# Altium PCB 15336-ROM3_tablet_RJ12.PcbDoc (part 1 of 2)
Units mil, origin at the board's own origin, x right, y up, seen from the top; angles counter-clockwise.
Board outline 3125 x 1750 mil, 4 copper layers (Top Layer, Ground, Inner, Bottom Layer), stack 61.434 mil thick; 35 components, 22 nets, 97 pads, 187 vias.
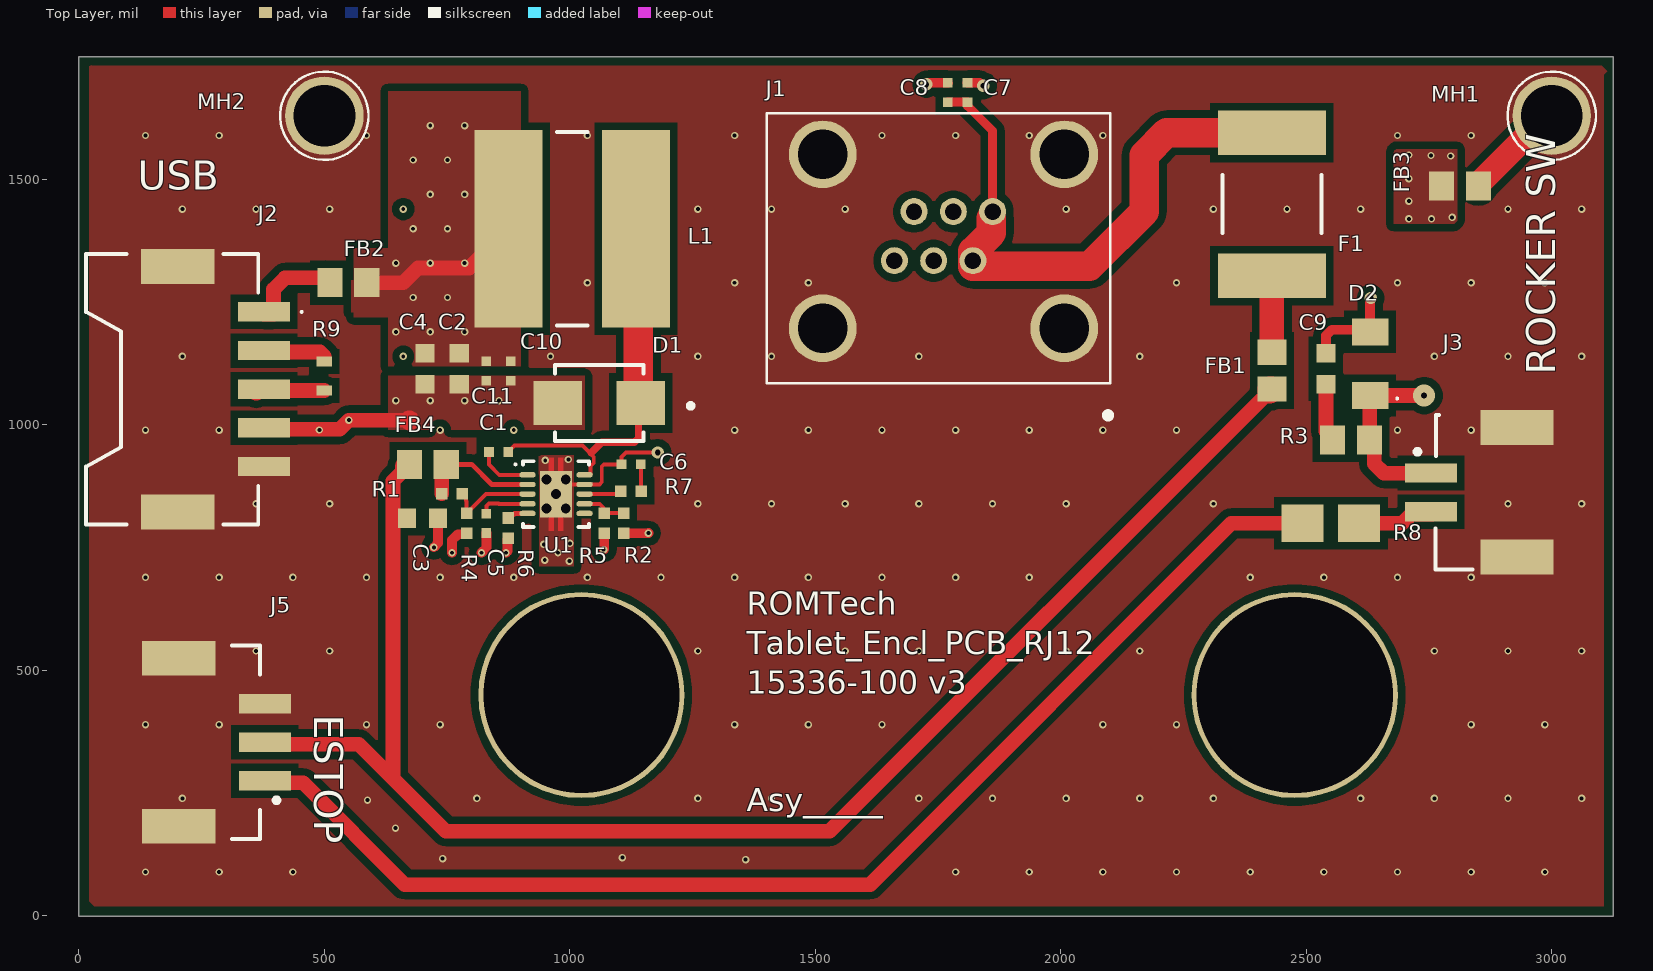
[diagram p0: Top Layer view]
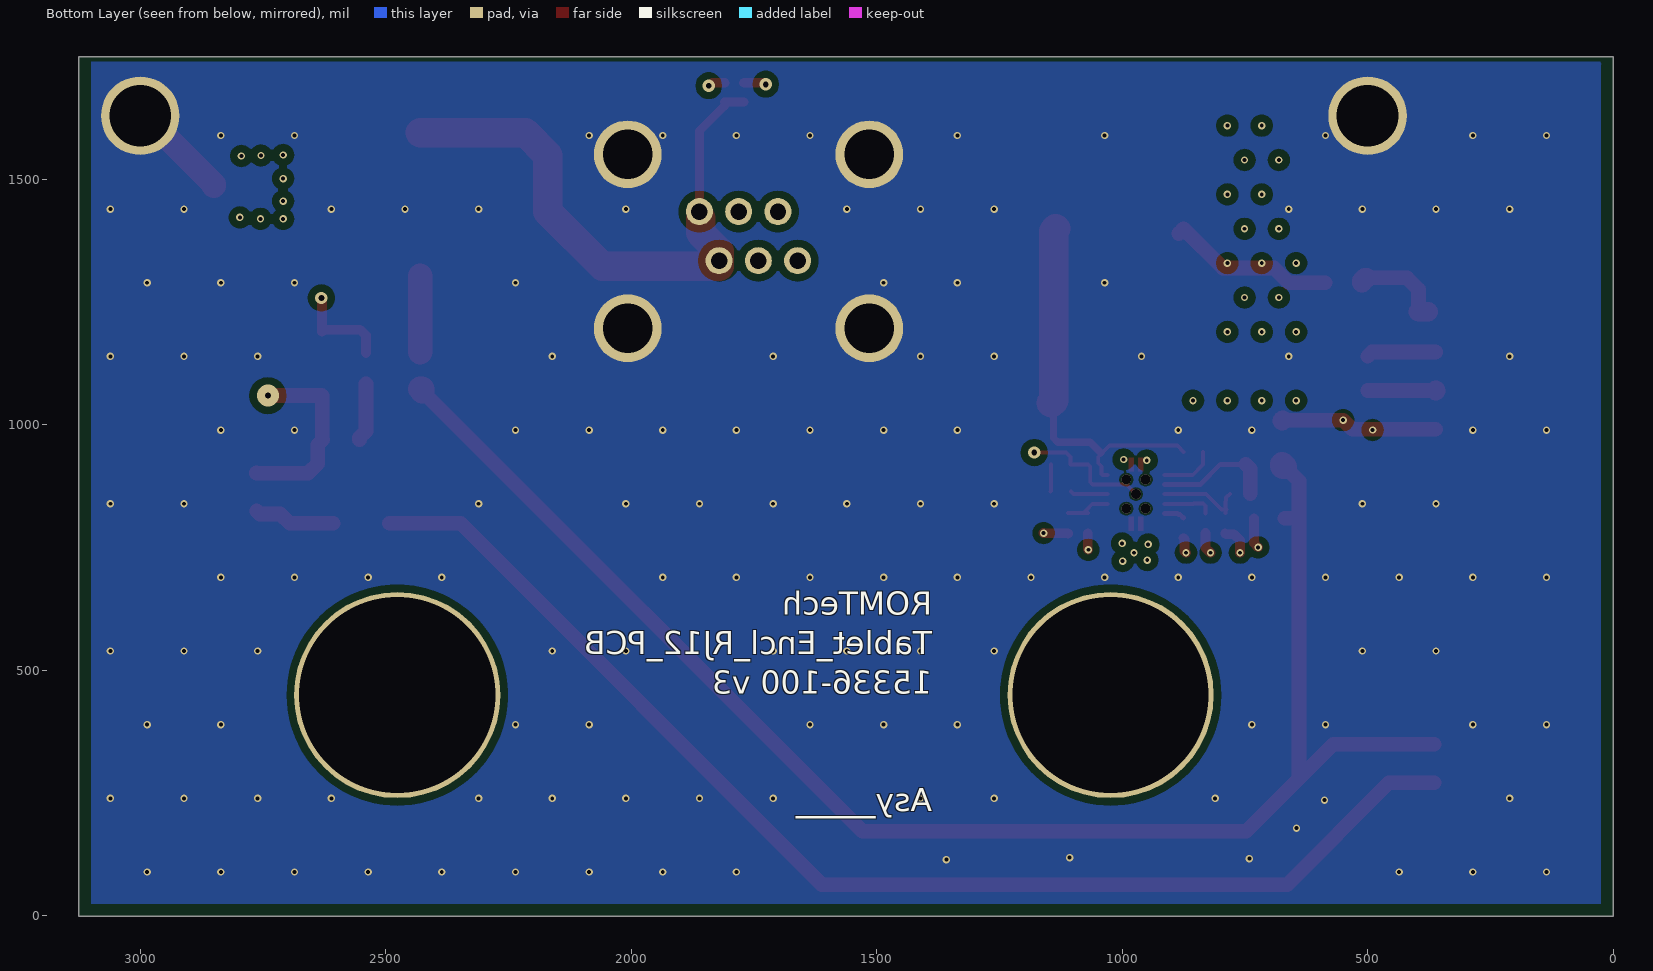
[diagram p1: Bottom Layer view, seen from below]
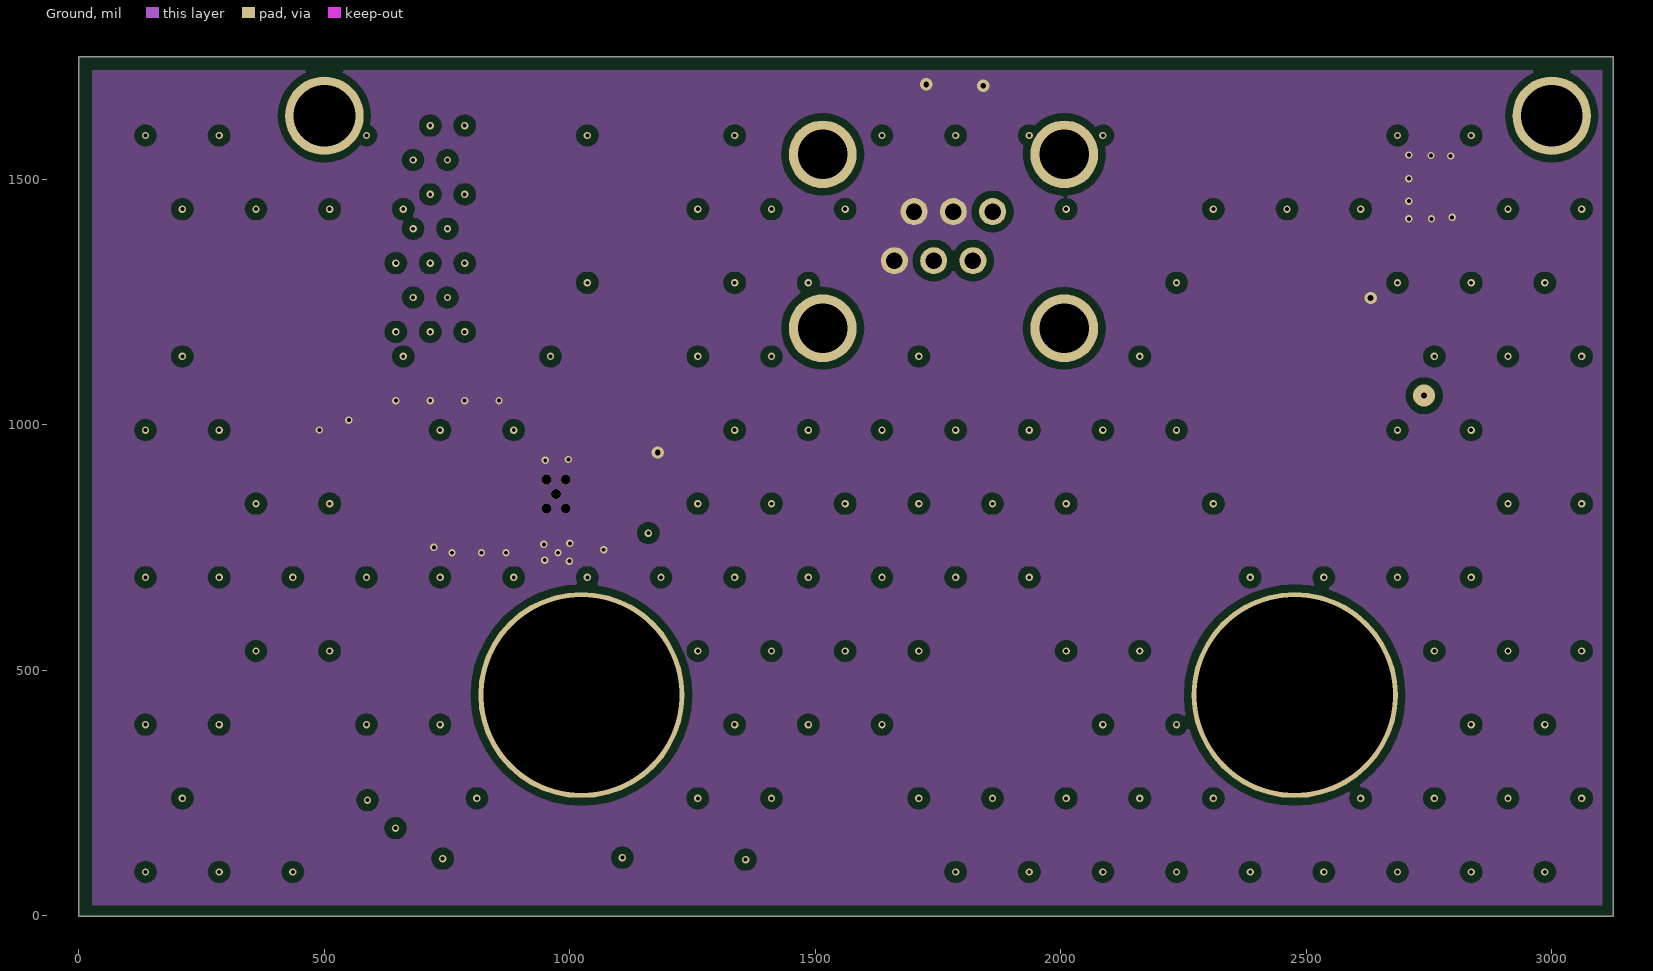
[diagram p2: Ground]
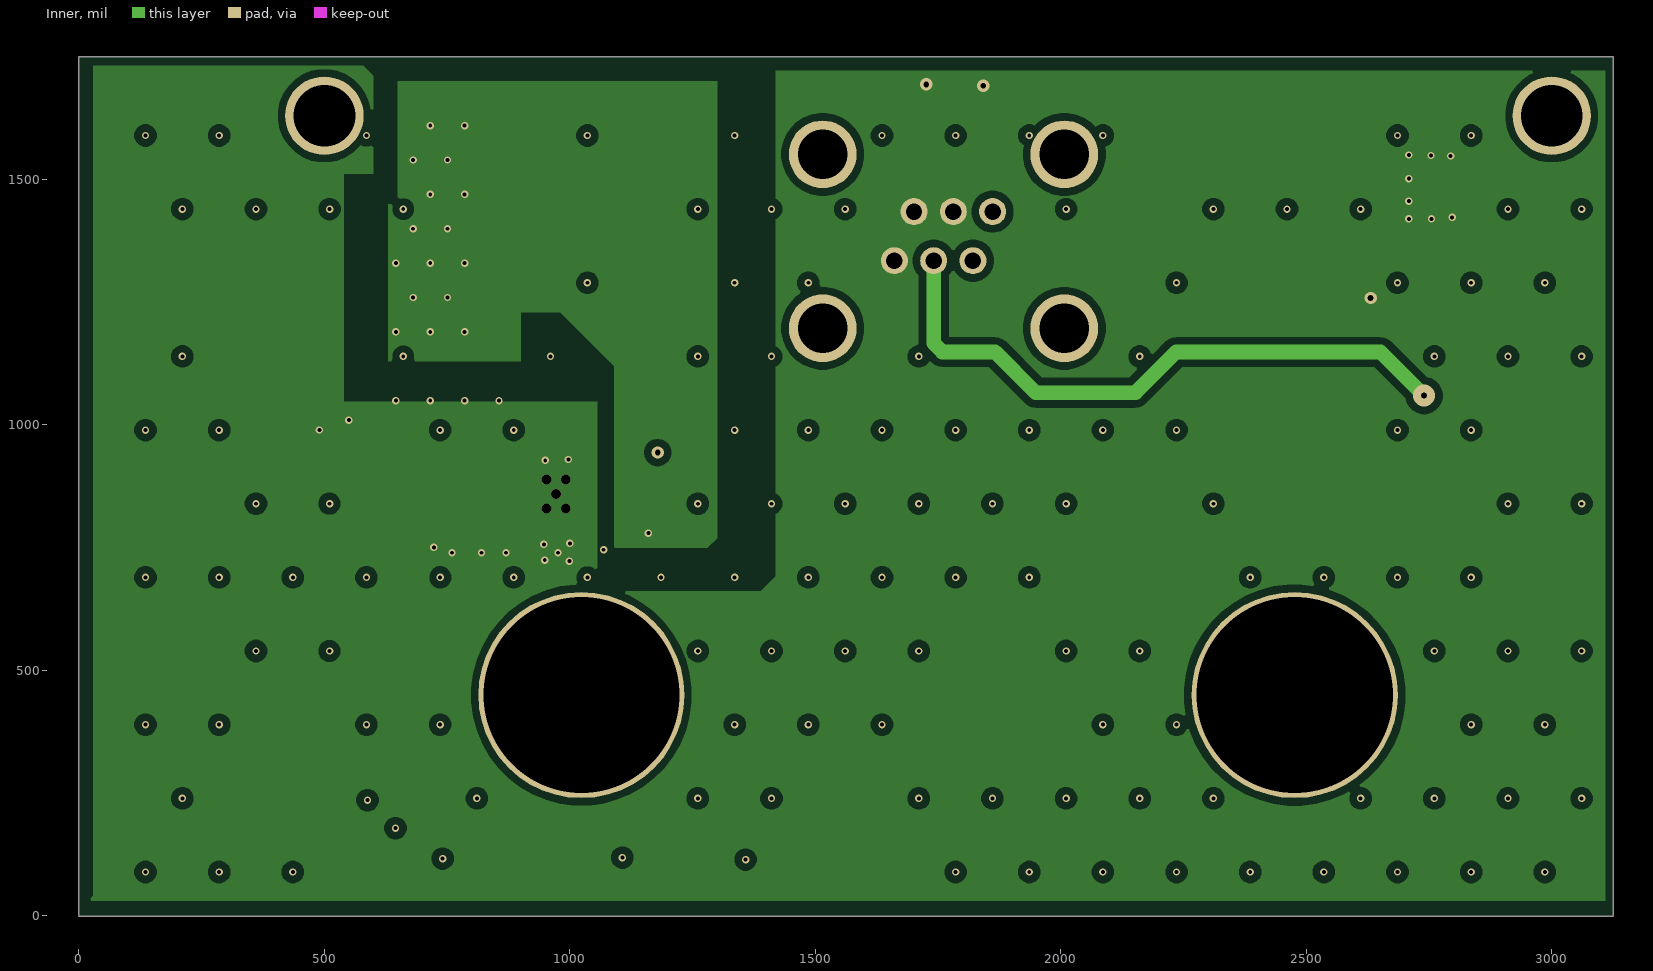
[diagram p3: Inner]
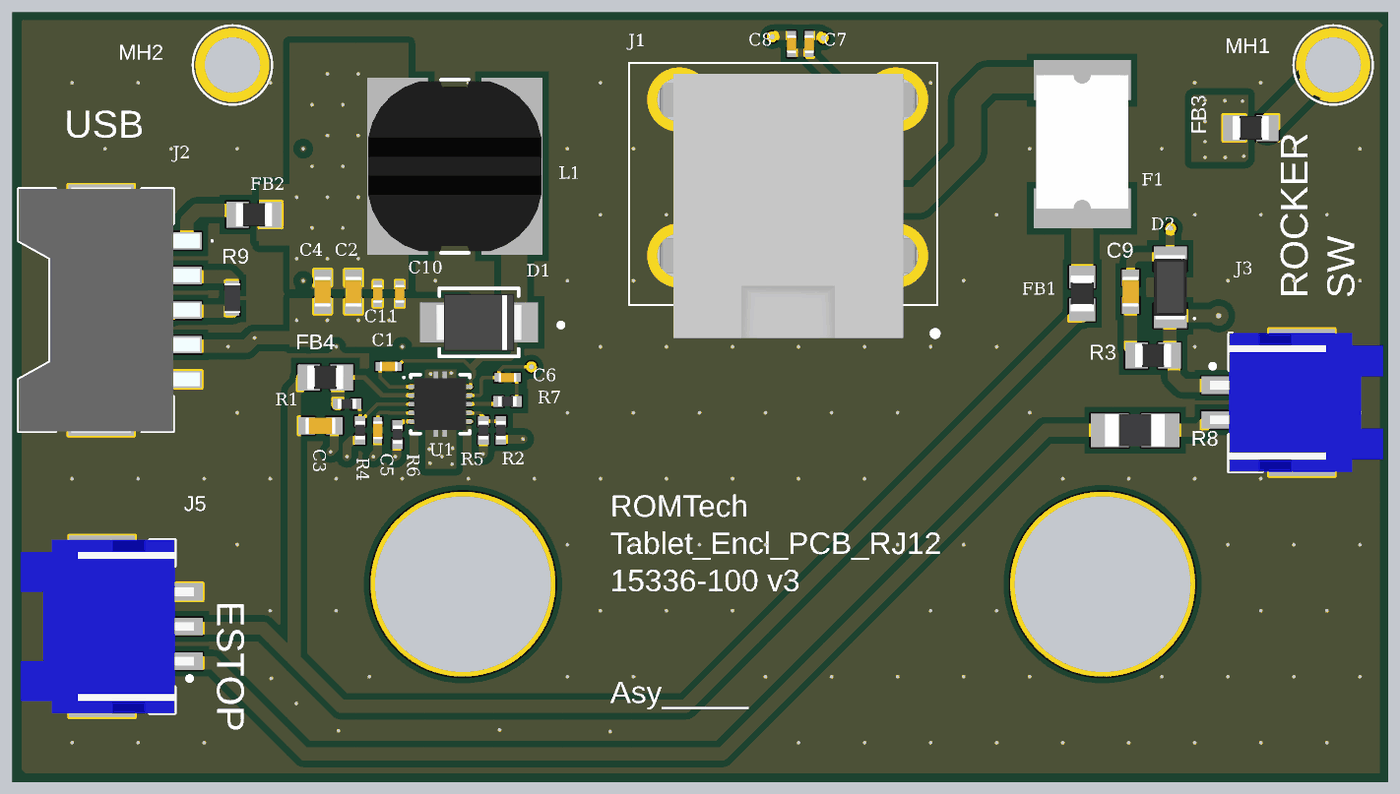
[diagram p4: 3D render of the assembled board from above, using the file's embedded part models]

## Layer stack, top to bottom
Top Solder: solder mask 0.4, Solder Resist, Dk 3.5
Top Layer: signal copper 1.4
Dielectric 2: prepreg 8.4, PP-006, Dk 4.1
Ground: signal copper 1.417
Dielectric 1: dielectric 39, FR-4, Dk 4.8
Inner: signal copper 1.417
Dielectric 3: prepreg 8.4, PP-006, Dk 4.1
Bottom Layer: signal copper 1.4
Bottom Solder: solder mask 0.4, Solder Resist, Dk 3.5

## Board outline
-0.06,1029.88 -0.06,1749.54 3124.94,1749.54 3124.94,-0.46 -0.06,-0.46

## Design rules (kind name [scope] priority, off if disabled: settings)
Clearance Clearance_2 [TouchesRoom('U1_Room') And (IsTrack or IsPad or IsVia) vs (IsTrack or IsPad or IsVia)] p1: gap=4 ignorepadtopadclearanceinfootprint=TRUE
Clearance [InComponent('U1')] p2: gap=4 ignorepadtopadclearanceinfootprint=TRUE
Clearance Clearance_1 [All] p3: gap=15 ignorepadtopadclearanceinfootprint=TRUE
DiffPairsRouting [All] p1: maxlimit=10 minlimit=10 mostfreqgap=10 toplayer_minwidth=15 toplayer_maxwidth=15 toplayer_prefwidth=15 midlayer1_minwidth=15 midlayer1_maxwidth=15 midlayer1_prefwidth=15 midlayer2_minwidth=15 midlayer2_maxwidth=15 midlayer2_prefwidth=15 bottomlayer_minwidth=15 bottomlayer_maxwidth=15 bottomlayer_prefwidth=15 substack1={1C1AEDB4-51BA-4CDF-8F38-87CF9DF56246} toplayer_{1c1aedb4-51ba-4cdf-8f38-87cf9df56246}_minwidth=15 toplayer_{1c1aedb4-51ba-4cdf-8f38-87cf9df56246}_maxwidth=15 toplayer_{1c1aedb4-51ba-4cdf-8f38-87cf9df56246}_prefwidth=15 midlayer1_{1c1aedb4-51ba-4cdf-8f38-87cf9df56246}_minwidth=15 midlayer1_{1c1aedb4-51ba-4cdf-8f38-87cf9df56246}_maxwidth=15 midlayer1_{1c1aedb4-51ba-4cdf-8f38-87cf9df56246}_prefwidth=15 midlayer2_{1c1aedb4-51ba-4cdf-8f38-87cf9df56246}_minwidth=15 midlayer2_{1c1aedb4-51ba-4cdf-8f38-87cf9df56246}_maxwidth=15 midlayer2_{1c1aedb4-51ba-4cdf-8f38-87cf9df56246}_prefwidth=15 bottomlayer_{1c1aedb4-51ba-4cdf-8f38-87cf9df56246}_minwidth=15 bottomlayer_{1c1aedb4-51ba-4cdf-8f38-87cf9df56246}_maxwidth=15 bottomlayer_{1c1aedb4-51ba-4cdf-8f38-87cf9df56246}_prefwidth=15 maxuncoupledlength=500
HoleSize [All] p1: absolutevalues=TRUE maxlimit=400 minlimit=1 maxpercent=80.000 minpercent=20.000
MinimumSolderMaskSliver [U1] p1: minsoldermaskwidth=5
PlaneConnect PlaneConnect_Via [IsVia] p1: planeconnectstyle=Direct reliefexpansion=20 reliefentries=4 reliefconductorwidth=10 reliefairgap=10
PlaneConnect PlaneConnect_1 [IsThruComponent] p2: planeconnectstyle=Relief reliefexpansion=20 reliefentries=4 reliefconductorwidth=25 reliefairgap=10
PolygonConnect PolygonConnect_SMD_small [All] p1: connectstyle=Direct reliefconductorwidth=10 reliefentries=4 polygonreliefangle="90 Angle" airgapwidth=10
PolygonConnect [All] p2: connectstyle=Relief reliefconductorwidth=25 reliefentries=4 polygonreliefangle="90 Angle" airgapwidth=10
RoomDefinition U1_Room [False] p1: confinementstyle=ConfineIn formatcopy=TRUE lockcomponents=FALSE outline 723.94,986.54 1130.94,986.54 1130.94,728.54 723.94,728.54
RoutingVias [All] p1: holewidth=12 width=25 viastyle="Through Hole" minholewidth=8 minwidth=15 maxholewidth=28 maxwidth=50
SilkToSolderMaskClearance [IsPad] p1: minsilkscreentomaskgap=5 clearancetoexposedcopper=TRUE
SolderMaskExpansion [All] p1: expansion=4 istentingtop=FALSE
Width [All] p1: maxlimit=60 minlimit=8 preferedwidth=30 substack1={1C1AEDB4-51BA-4CDF-8F38-87CF9DF56246}
25 further rules are at their usual default settings.

## Components (designator, comment, footprint, x,y, rotation, side; value= is the part's Value field where it differs from the comment)
C1 "0.1uF" CAPC0402X06N 854.94,944.54 r180 top
C2 "22uF" CAPC0603X10N 774.94,1114.54 r90 top
C3 "4.7uF" CAPC0603X10N 699.94,809.54 r180 top
C4 "22uF" CAPC0603X10N 704.94,1114.54 r90 top
C5 "0.01uF" CAPC0402X06N 829.94,799.54 r90 top
C6 "2700pF" CAPC0402X06N 1124.94,919.54 r0 top
C7 "0.1uF" CAPC0402X06N 1770,1677 r90 top
C8 "0.01uF" CAPC0402X06N 1810,1677 r270 top
C9 "100pF" CAPC0603X10N 2539.94,1114.54 r90 top
C10 "0.1uF" CAPC0402X06N 879.94,1109.54 r270 top
C11 "1uF" CAPC0402X06N 829.94,1109.54 r90 top
D1 "B360B-13-F" SMB 1059.94,1044.54 r180 top
D2 "BZT52C12-13-F" SOD-123/Mini-SMA 2629.94,1124.54 r270 top
F1 "Fuse" FUSE2920 2429.94,1449.54 r90 top
FB1 "60R" "Ferrite 0805" 2429.94,1109.54 r270 top
FB2 "60R" "Ferrite 0805" 549.94,1289.54 r0 top
FB3 "60R" "Ferrite 0805" 2813.94,1486.54 r0 top
FB4 "60R" "Ferrite 0805" 709.94,919.54 r180 top
J1 "TM11R-5C-66(50)" RJ12 1761,1434.4 r0 top
J2 "SM05B-PASS-TBT_LF__SN_" SM05BPASSTBTLFSN 195.94,1072.54 r90 top
J3 "SM02B-PASS-TBT(LF)(SN)" SM02B-PASS-TBT(LF)(SN) 2938.94,862.54 r270 top
J5 "SM03B-PASS-TBT(LF)(SN)" SM03B-PASS-TBT(LF)(SN) 193.94,353.54 r0 top
L1 "47uH" SRN1060 1004.94,1399.54 r180 top
MH1 "M3" M3_Hole 2999.94,1629.54 r0 top
MH2 "M3" M3_Hole 499.94,1629.54 r0 top
R1 "332K" RESC0402X04N 759.94,859.54 r180 top
R2 "52.3K" RESC0402X04N 1109.94,799.54 r90 top
R3 "1k" RESC0805X06N 2589.94,969.54 r180 top
R4 "56.2K" RESC0402X04N 789.94,799.54 r90 top
R5 "10K" RESC0402X04N 1069.94,799.54 r270 top
R6 "165K" RESC0402X04N 874.94,789.54 r90 top
R7 "76.8K" RESC0402X04N 1124.44,865.03 r0 top
R8 "2K" RESC1206X09N 2549.94,799.54 r180 top
R9 "0" RESC0603X06N 499.94,1099.54 r270 top
U1 "TPS54260DRCR" "10-VSON (3x3) EXPOSED" 971.87,858.91 r0 top

## Footprints (in the part's own frame and the unit in brackets; to place one, negate y for a bottom-side part, rotate by r counter-clockwise, add the part's x,y. Pads: shape width x height; smd on the part's side, far side on the other; paste and mask are expansions set on the pad)
"10-VSON (3x3) EXPOSED" [mm] "SON, 10-Leads, Body 3x3mm, Pitch 0.5mm, Thermal Pad 2.4x1.65mm, TI Recommended"
  oval 0.85x0.28 smd paste-0.025 mask+0.07: 1(-1.475,1) 2(-1.475,0.5) 3(-1.475,0) 4(-1.475,-0.5) 5(-1.475,-1) 6(1.475,-1) 7(1.475,-0.5) 8(1.475,0) 9(1.475,0.5) 10(1.475,1)
  rect 1.65x2.4 smd paste-0.825 mask+0.07: 11(0,0)
  Top Layer region: -0.39,1.16 -0.11,1.16 -0.11,1.9 -0.39,1.9
  Top Layer region: 0.39,1.9 0.11,1.9 0.11,1.16 0.39,1.16
  Top Layer region: 0.39,-1.16 0.11,-1.16 0.11,-1.9 0.39,-1.9
  Top Layer region: -0.39,-1.9 -0.11,-1.9 -0.11,-1.16 -0.39,-1.16
  silkscreen extent -2.15,-1.7 1.7,1.7, body extent -1.55,-1.55 1.55,1.55, height 1
CAPC0402X06N [mm] "Chip Capacitor, 2-Leads, Body 04x02mil, IPC Medium Density"
  rect 0.5x0.5 smd: 1(-0.5,0) 2(0.5,0)
  body extent -0.53,-0.28 0.53,0.28, height 0.55
CAPC0603X10N [mm] "Chip Capacitor, 2-Leads, Body 06x03mil, IPC Medium Density"
  rect 0.95x1 smd: 1(-0.8,0) 2(0.8,0)
  body extent -0.87,-0.48 0.87,0.48, height 0.8
"Ferrite 0805" [mm] "Ferrite Bead, 2-Leads, Body 08x05mil, IPC Medium Density"
  rect 1.3x1.5 smd: 1(0.925,0) 2(-0.975,0)
  body extent -1.08,-0.68 1.02,0.67, height 0.6
FUSE2920 [mm] "SMD Fuse, 29x20mil"
  rect 2.3x5.6 smd paste+0 mask+0: 1(-3.7,0) 2(3.7,0)
  silkscreen extent -1.5,-2.56 1.5,2.56, body extent -3.71,-2.65 4,2.65, height 1.02
M3_Hole [mil]
  round 160 hole 126: 1(0,0)
  silkscreen extent -90,-90 90,90
RESC0402X04N [mm] "Chip Resistor, 2-Leads, Body 4x2mil, IPC Medium Density"
  rect 0.6x0.6 smd: 1(-0.525,0) 2(0.525,0)
  body extent -0.53,-0.28 0.53,0.28, height 0.4
RESC0603X06N [mm] "Chip Resistor, 2-Leads, Body 06x03mil, IPC Medium Density"
  rect 0.5x0.8 smd: 1(-0.75,0) 2(0.75,0)
  body extent -0.85,-0.45 0.85,0.45, height 0.55
RESC0805X06N [mm] "Chip Resistor, 2-Leads, Body 08x05mil, IPC Medium Density"
  rect 1.3x1.5 smd: 1(0.925,0) 2(-0.975,0)
  body extent -1.08,-0.68 1.02,0.67, height 0.6
RESC1206X09N [mm] "Chip Resistor, 2-Leads, Body 12x06mil, IPC Medium Density"
  rect 2.18x1.93 smd: 1(-1.46,0) 2(1.46,0)
  body extent -1.73,-0.92 1.73,0.92, height 0.89
RJ12 [mil] "R/A 6P6C"
  round 55 hole 33.46: 1(100,0)
  round 55 hole 33.47: 2(60,-100) 3(20,0) 4(-20,-100) 5(-60,0) 6(-100,-100)
  round 138 hole 100.4: 7(-246.06,-237.8) 8(246.06,-237.8) 9(246.06,116.54) 10(-246.06,116.54)
  silkscreen extent -360,-420 340,200, body extent -290,-425 293,175, height 565
SM02B-PASS-TBT(LF)(SN) [mm] "Connector Header Surface Mount, Right Angle 2 position 0.079\" (2.00mm)"
  rect 1x2.7 smd paste+0: 1(-1,-4.7) 2(1,-4.7)
  rect 1.8x3.8 smd paste+0: 3(-3.35,-0.25) 3(3.35,-0.25)
  silkscreen extent -4,-5.52 3.99,-2.54, body extent -4,-5.55 4,4.45, height 5.7
SM03B-PASS-TBT(LF)(SN) [mm] "Connector Header Surface Mount, Right Angle 3 position 0.079\" (2.00mm)"
  rect 2.7x1 smd paste+0: 1(4.7,-2) 2(4.7,0) 3(4.7,2)
  rect 3.8x1.8 smd paste+0: MF(0.25,-4.35) MF(0.25,4.35)
  silkscreen extent 3,-5 5.43,5, body extent -4.45,-5 5.55,5, height 5.7
SM05BPASSTBTLFSN [mm]
  rect 1x2.7 smd: 1(4,-4.6) 2(2,-4.6) 3(0,-4.6) 4(-2,-4.6) 5(-4,-4.6)
  rect 1.8x3.8 smd: MP1(6.35,-0.15) MP2(-6.35,-0.15)
  silkscreen extent -7,-6.6 7,4.6, body extent -7.07,-5.85 7.07,4.6, height 5.8
SMB [mm] "Molded Diode, 2-Leads, Body 5.59x3.94mm, IPC Medium Density"
  rect 2.5x2.3 smd paste+0 mask+0: 1(2.15,0) 2(-2.15,0)
  silkscreen extent -4.85,-1.97 2.28,1.97, body extent -3.5,-2.07 3.5,2.07, height 0.25
SOD-123/Mini-SMA [mm] "SOD, 2-Leads, Body 1.70x3.70mm, IPC Medium Density"
  rect 1.4x1.9 smd: 1(-1.65,0) 2(1.65,0)
  silkscreen extent 1.75,1.35 1.85,1.45, body extent -1.85,-0.95 1.85,0.95, height 1.7
SRN1060 [mm] "Precision Wire Wound Inductor, 2-Leads, Body 10.0x9.8mm, IPC Medium Density"
  rect 3.5x10.2 smd paste+0 mask+0: 1(-3.3,0) 2(3.3,0)
  silkscreen extent -0.8,-5 0.8,5, body extent -5.15,-5.25 5.15,5.25, height 0.25

## Part data
C1 C7 C10: library part "Cap NP", "0.1µF ±10% 50V Ceramic Capacitor X5R 0402 (1005 Metric)", Capacitance=100nF, Case/Package=0402, Dielectric=X5R, Manufacturer 1=Yageo, Manufacturer Part Number 1=CC0402KRX5R9BB104, Max Operating Temperature=85°C, Min Operating Temperature=-55°C, Supplier Part Number 1=311-3342-2-ND, Tolerance=10%, Voltage Rating=50V, ComponentLink1Description=http://www.yageo.com/documents/recent/UPY-GPHC_X5R_4V-to-50V_23.pdf?src-supplier=Digi-Key, ComponentLink1URL=http://www.yageo.com/documents/recent/UPY-GPHC_X5R_4V-to-50V_23.pdf?src-supplier=Digi-Key, ComponentLink2Description=http://www.yageo.com/documents/recent/UPY-GPHC_X5R_4V-to-50V_25.pdf?src-supplier=Digi-Key, ComponentLink2URL=http://www.yageo.com/documents/recent/UPY-GPHC_X5R_4V-to-50V_25.pdf?src-supplier=Digi-Key, Halogen Free="Halogen Free", Lead Free="Lead Free", Length=0.039inch, Mount="Surface Mount", Packaging="Tape and Reel", Pricing 1="10000=0.00666, 20000=0.00634, 30000=0.00602, 50000=0.00539, 100000=0.00476 (USD)", RoHS=Yes, Stock 1=827511, Supplier 1=Digi-Key, Thickness=0.022inch, Voltage Rating (DC)=50V, Width=0.02inch
C2 C4: library part "Cap NP", "22µF ±20% 6.3V Ceramic Capacitor X5R 0603 (1608 Metric)", Case Code (Imperial)=0603, Case Code (Metric)=1608, Dielectric=X5R, Manufacturer 1=Murata, Manufacturer Part Number 1=GRM188R60J226MEA0D, Max Operating Temperature=85°C, Min Operating Temperature=-55°C, Package Quantity=4000, Supplier Part Number 1=490-7611-2-ND, Tolerance=20%, Voltage Rating=6.3V, Capacitance=22uF, Case/Package=0603, ComponentLink1Description=https://datasheet.ciiva.com/29540/partnumbering-e-01-29540441.pdf?src-supplier=Digi-Key, ComponentLink1URL=https://datasheet.ciiva.com/29540/partnumbering-e-01-29540441.pdf?src-supplier=Digi-Key, ComponentLink2Description=https://datasheet.ciiva.com/29540/partnumbering-e-01-29540442.pdf?src-supplier=Digi-Key, ComponentLink2URL=https://datasheet.ciiva.com/29540/partnumbering-e-01-29540442.pdf?src-supplier=Digi-Key, ComponentLink3Description=https://datasheet.ciiva.com/29540/partnumbering-e-01-29540443.pdf?src-supplier=Digi-Key, ComponentLink3URL=https://datasheet.ciiva.com/29540/partnumbering-e-01-29540443.pdf?src-supplier=Digi-Key, Depth=0.8mm, Height=0.8mm, Lead Free="Lead Free", Length=1.6mm, Mount="Surface Mount", Packaging="Tape and Reel", Pricing 1="4000=0.04731, 8000=0.04475, 12000=0.04245, 28000=0.04091, 100000=0.03580 (USD)", REACH SVHC="No SVHC", RoHS=Yes, Stock 1=5622507, Supplier 1=Digi-Key, Termination=SMD/SMT, Thickness=0.039inch, Voltage Rating (DC)=6.3V, Weight=0.000222oz, Width=0.8mm
C3: library part "Cap NP", "4.7µF ±10% 35V Ceramic Capacitor X5R 0603 (1608 Metric)", Case Code (Imperial)=0603, Case Code (Metric)=1608, Dielectric=X5R, Manufacturer 1=Murata, Manufacturer Part Number 1=GRM188R6YA475KE15D, Max Operating Temperature=85°C, Min Operating Temperature=-55°C, Package Quantity=4000, Supplier Part Number 1=490-7205-2-ND, Tolerance=10%, Voltage=35V, Capacitance=4.7uF, Case/Package=0603, ComponentLink1Description=https://datasheet.ciiva.com/46444/1769893-46444984.pdf?src-supplier=Element14, ComponentLink1URL=https://datasheet.ciiva.com/46444/1769893-46444984.pdf?src-supplier=Element14, ComponentLink2Description=https://datasheet.ciiva.com/46444/1769893-46444985.pdf?src-supplier=Element14, ComponentLink2URL=https://datasheet.ciiva.com/46444/1769893-46444985.pdf?src-supplier=Element14, ComponentLink3Description=https://datasheet.ciiva.com/14906/partnumbering-e-01-14906426.pdf?src-supplier=Digi-Key, ComponentLink3URL=https://datasheet.ciiva.com/14906/partnumbering-e-01-14906426.pdf?src-supplier=Digi-Key, ComponentLink4Description=https://datasheet.ciiva.com/14906/partnumbering-e-01-14906427.pdf?src-supplier=Digi-Key, ComponentLink4URL=https://datasheet.ciiva.com/14906/partnumbering-e-01-14906427.pdf?src-supplier=Digi-Key, ComponentLink5Description=https://datasheet.ciiva.com/14906/partnumbering-e-01-14906428.pdf?src-supplier=Digi-Key, ComponentLink5URL=https://datasheet.ciiva.com/14906/partnumbering-e-01-14906428.pdf?src-supplier=Digi-Key, Composition=Ceramic, Depth=0.8mm, Height=0.8mm, Lead Free="Lead Free", Length=1.6mm, Material=Ceramic, Mount="Surface Mount", Packaging="Tape and Reel", Pricing 1="4000=0.09384, 8000=0.08832, 12000=0.08556, 28000=0.08280, 100000=0.07728 (USD)", REACH SVHC="No SVHC", RoHS=Yes, Stock 1=280000, Supplier 1=Digi-Key, Termination=SMD/SMT, Thickness=0.031inch, Voltage Rating=35V, Voltage Rating (DC)=35V, Weight=0.000222oz, Width=0.8mm
C5 C8: library part "Cap NP", "10000pF ±10% 50V Ceramic Capacitor X7R 0402 (1005 Metric)", Capacitance=10nF, Case Code (Imperial)=0402, Case Code (Metric)=1005, Dielectric=X7R, Manufacturer 1=Yageo, Manufacturer Part Number 1=CC0402KRX7R9BB103, Max Operating Temperature=125°C, Min Operating Temperature=-55°C, Package Quantity=1, Supplier Part Number 1=311-1349-2-ND, Tolerance=10%, Voltage=50V, Case/Package=0402, ComponentLink1Description=https://datasheet.ciiva.com/26862/getdatasheetpartid-138248-26862642.pdf?src-supplier=Verical, ComponentLink1URL=https://datasheet.ciiva.com/26862/getdatasheetpartid-138248-26862642.pdf?src-supplier=Verical, ComponentLink2Description=https://datasheet.ciiva.com/11788/0900766b8079c870-11788375.pdf?src-supplier=RSComponents, ComponentLink2URL=https://datasheet.ciiva.com/11788/0900766b8079c870-11788375.pdf?src-supplier=RSComponents, ComponentLink3Description=https://datasheet.ciiva.com/16625/upy-gphc-x7r-6-3v-to-50v-8-16625513.pdf?src-supplier=Avnet+Europe, ComponentLink3URL=https://datasheet.ciiva.com/16625/upy-gphc-x7r-6-3v-to-50v-8-16625513.pdf?src-supplier=Avnet+Europe, ComponentLink4Description=https://datasheet.ciiva.com/28450/1489800-28450377.pdf?src-supplier=Element14, ComponentLink4URL=https://datasheet.ciiva.com/28450/1489800-28450377.pdf?src-supplier=Element14, ComponentLink5Description=https://datasheet.ciiva.com/176/mlccorderingcode-176348.pdf?src-supplier=Digi-Key, ComponentLink5URL=https://datasheet.ciiva.com/176/mlccorderingcode-176348.pdf?src-supplier=Digi-Key, ComponentLink6Description=https://datasheet.ciiva.com/176/mlccorderingcode-176349.pdf?src-supplier=Digi-Key, ComponentLink6URL=https://datasheet.ciiva.com/176/mlccorderingcode-176349.pdf?src-supplier=Digi-Key, ComponentLink7Description=https://datasheet.ciiva.com/7978/1489800-7978093.pdf?src-supplier=Element14, ComponentLink7URL=https://datasheet.ciiva.com/7978/1489800-7978093.pdf?src-supplier=Element14, ComponentLink8Description=https://datasheet.ciiva.com/176/mlccorderingcode-176350.pdf?src-supplier=Digi-Key, ComponentLink8URL=https://datasheet.ciiva.com/176/mlccorderingcode-176350.pdf?src-supplier=Digi-Key, Composition=Ceramic, Depth=0.5mm, Halogen Free="Halogen Free", Height=0.5mm, Lead Free="Lead Free", Length=1mm, Mount="Surface Mount", Packaging="Tape and Reel", Pricing 1="10000=0.00309, 20000=0.00294, 30000=0.00279, 50000=0.00250, 100000=0.00206 (USD)", Radiation Hardening=No, REACH SVHC="No SVHC", RoHS=Yes, Stock 1=2489775, Supplier 1=Digi-Key, Termination=SMD/SMT, Thickness=0.022inch, Voltage Rating=50V, Voltage Rating (DC)=50V, Width=0.5mm
C6: library part "Cap NP", "2700pF ±10% 50V Ceramic Capacitor X7R 0402 (1005 Metric)", Capacitance=2.7nF, Case Code (Imperial)=0402, Case Code (Metric)=1005, Dielectric=X7R, Manufacturer 1=Murata, Manufacturer Part Number 1=GRM155R71H272KA01J, Max Operating Temperature=125°C, Min Operating Temperature=-55°C, Package Quantity=50000, Supplier Part Number 1=490-6361-2-ND, Tolerance=10%, Voltage=50V, Case/Package=0402, ComponentLink1Description=https://datasheet.ciiva.com/6271/partnumbering-e-01-6271238.pdf?src-supplier=Digi-Key, ComponentLink1URL=https://datasheet.ciiva.com/6271/partnumbering-e-01-6271238.pdf?src-supplier=Digi-Key, ComponentLink2Description=https://datasheet.ciiva.com/6271/partnumbering-e-01-6271240.pdf?src-supplier=Digi-Key, ComponentLink2URL=https://datasheet.ciiva.com/6271/partnumbering-e-01-6271240.pdf?src-supplier=Digi-Key, ComponentLink3Description=https://datasheet.ciiva.com/6271/partnumbering-e-01-6271242.pdf?src-supplier=Digi-Key, ComponentLink3URL=https://datasheet.ciiva.com/6271/partnumbering-e-01-6271242.pdf?src-supplier=Digi-Key, ComponentLink4Description=https://datasheet.ciiva.com/11620/product-11620523.pdf?src-supplier=Avnet, ComponentLink4URL=https://datasheet.ciiva.com/11620/product-11620523.pdf?src-supplier=Avnet, Depth=0.5mm, Height=0.5mm, Length=1mm, Mount="Surface Mount", Packaging="Tape and Reel", Pricing 1="50000=0.00391, 100000=0.00345 (USD)", Radiation Hardening=No, RoHS=Yes, Stock 1=250000, Supplier 1=Digi-Key, Termination=SMD/SMT, Thickness=0.022inch, Voltage Rating=50V, Voltage Rating (DC)=50V, Width=0.02inch
C9: library part "Cap NP", "Non-polarized Capactior", Supplier Part Number 1=490-11435-1-ND, Supplier 1=Digi-Key
C11: library part "Cap NP", "1µF ±10% 6.3V Ceramic Capacitor X5R 0402 (1005 Metric)", Case Code (Imperial)=0402, Dielectric=X5R, Dielectric Material=Ceramic, Manufacturer 1=KEMET, Manufacturer Part Number 1=C0402C105K9PACTU, Max Operating Temperature=85°C, Min Operating Temperature=-55°C, Package Quantity=1, Supplier Part Number 1=399-4873-2-ND, Tolerance=10%, Voltage=6.3V, Capacitance=1uF, Case/Package=0402, ComponentLink1Description=https://datasheet.ciiva.com/11786/0900766b8116eb59-11786028.pdf?src-supplier=RSComponents, ComponentLink1URL=https://datasheet.ciiva.com/11786/0900766b8116eb59-11786028.pdf?src-supplier=RSComponents, ComponentLink2Description=https://datasheet.ciiva.com/28645/1789732-28645392.pdf?src-supplier=Element14, ComponentLink2URL=https://datasheet.ciiva.com/28645/1789732-28645392.pdf?src-supplier=Element14, ComponentLink3Description=https://datasheet.ciiva.com/7747/kem-c1006-x5r-smd-7747445.pdf?src-supplier=Element14, ComponentLink3URL=https://datasheet.ciiva.com/7747/kem-c1006-x5r-smd-7747445.pdf?src-supplier=Element14, ComponentLink4Description=https://datasheet.ciiva.com/7747/40889-7747623.pdf?src-supplier=Element14, ComponentLink4URL=https://datasheet.ciiva.com/7747/40889-7747623.pdf?src-supplier=Element14, Depth=0.5mm, Height=0.5mm, Lead Free="Lead Free", Lead Pitch=0.3mm, Length=1mm, Mount="Surface Mount", Number of Pins=2, Packaging="Tape and Reel", Pricing 1="10000=0.00439, 20000=0.00418, 30000=0.00397, 50000=0.00355, 100000=0.00287 (USD)", Radiation Hardening=No, REACH SVHC="No SVHC", RoHS=Yes, Stock 1=1587114, Supplier 1=Digi-Key, Termination=SMD/SMT, Thickness=0.022inch, Voltage Rating=6.3V, Voltage Rating (DC)=6.3V, Width=0.02inch
D1: "Diode Schottky 60V 3A Surface Mount SMB", Average Rectified Current=3A, Capacitance=250pF, Case/Package=SMB, Forward Voltage=700mV, Manufacturer 1=Diodes, Max Forward Surge Current (Ifsm)=100A, Max Operating Temperature=150°C, Max Repetitive Reverse Voltage (Vrrm)=60V, Min Operating Temperature=-55°C, Package Quantity=3000, Peak Reverse Current=500uA, Supplier Part Number 1=B360B-FDITR-ND, ComponentLink1Description=https://datasheet.ciiva.com/34302/1538911-34302362.pdf?src-supplier=Jameco, ComponentLink1URL=https://datasheet.ciiva.com/34302/1538911-34302362.pdf?src-supplier=Jameco, ComponentLink2Description=https://datasheet.ciiva.com/26949/getdatasheetpartid-142114-26949359.pdf?src-supplier=Verical, ComponentLink2URL=https://datasheet.ciiva.com/26949/getdatasheetpartid-142114-26949359.pdf?src-supplier=Verical, ComponentLink3Description=https://datasheet.ciiva.com/1177/ds30924-1177528.pdf?src-supplier=Element14, ComponentLink3URL=https://datasheet.ciiva.com/1177/ds30924-1177528.pdf?src-supplier=Element14, Contact Plating=Tin,Matte, Current=3A, Current Rating=3A, Element Configuration=Single, Forward Current=3A, Height=2.5mm, Lead Free="Lead Free", Length=4.57mm, Manufacturer Part Number 1=B360B-13-F, Max Reverse Voltage (DC)=60V, Mount="Surface Mount", Number of Pins=2, Output Current=3A, Packaging="Tape and Reel", Peak Non-Repetitive Surge Current=100A, Polarity=Standard, Pricing 1="3000=0.14090, 6000=0.12726, 15000=0.11817, 30000=0.11544, 75000=0.11181 (USD)", Radiation Hardening=No, REACH SVHC="No SVHC", RoHS=Yes, Stock 1=54000, Supplier 1=Digi-Key, Termination=SMD/SMT, Voltage=60V, Voltage Rating (DC)=60V, Weight=0.00328oz, Width=3.94mm
D2: "Zener Diode 12V 500mW ±5% Surface Mount SOD-123", Case/Package=SOD-123-2, Forward Voltage=900mV, Manufacturer 1=Diodes, Max Operating Temperature=150°C, Max Power Dissipation=500mW, Max Reverse Leakage Current=100nA, Min Operating Temperature=-65°C, Output Current=50mA, Package Quantity=10000, Supplier Part Number 1=BZT52C1213-FDITR-ND, Test Current=5mA, Tolerance=5%, Voltage Rating (DC)=12V, ComponentLink1Description=https://datasheet.ciiva.com/26943/getdatasheetpartid-38893-26943274.pdf?src-supplier=Verical, ComponentLink1URL=https://datasheet.ciiva.com/26943/getdatasheetpartid-38893-26943274.pdf?src-supplier=Verical, Contact Plating=Tin,Matte, Element Configuration=Single, ESD Protection=No, Height=1.35mm, Impedance=25R, Lead Free="Lead Free", Length=2.85mm, Manufacturer Part Number 1=BZT52C12-13-F, Mount="Surface Mount", Number of Pins=2, Packaging="Tape and Reel", Peak Reverse Current=100nA, Power Dissipation=500mW, Power Rating=500mW, Pricing 1="10000=0.02576, 30000=0.02530, 50000=0.02273, 100000=0.02015, 250000=0.01970 (USD)", Radiation Hardening=No, RoHS=Yes, Stock 1=88458, Supplier 1=Digi-Key, Voltage Tolerance=5%, Weight=0.000353oz, Width=1.7mm, Zener Current=100nA, Zener Voltage=12V
F1: "Polymeric PTC Resettable Fuse 33V 1.85A Ih Surface Mount 2920 (7351 Metric), Concave", Case Code (Imperial)=2920, Case Code (Metric)=7351, Hold Current=1.85A, Manufacturer 1=Bel, Manufacturer Part Number 1=0ZCF0185FF2C, Max Current Rating=40A, Package Quantity=1, Supplier Part Number 1=507-1747-2-ND, Trip Current=3.7A, ComponentLink1Description=https://datasheet.ciiva.com/18550/0zcf-18550652.pdf?src-supplier=Digi-Key, ComponentLink1URL=https://datasheet.ciiva.com/18550/0zcf-18550652.pdf?src-supplier=Digi-Key, ComponentLink2Description=https://datasheet.ciiva.com/18550/0zcf-18550653.pdf?src-supplier=Digi-Key, ComponentLink2URL=https://datasheet.ciiva.com/18550/0zcf-18550653.pdf?src-supplier=Digi-Key, ComponentLink3Description=https://datasheet.ciiva.com/18550/0zcf-18550654.pdf?src-supplier=Digi-Key, ComponentLink3URL=https://datasheet.ciiva.com/18550/0zcf-18550654.pdf?src-supplier=Digi-Key, Lead Free="Lead Free", Packaging="Tape and Reel", Pricing 1="2000=0.13090, 4000=0.12320, 6000=0.11550, 10000=0.10780 (USD)", RoHS=Yes, Stock 1=76000, Supplier 1=Digi-Key, Time to Trip=2.5s
FB1 FB2 FB3 FB4: library part Ferrite, "60 Ohms @ 100MHz 1 Power Line Ferrite Bead 0805 (2012 Metric) 3A 25mOhm", Case Code (Imperial)=0805, Case Code (Metric)=2125, DC Resistance (DCR)=25mR, Manufacturer 1="Taiyo Yuden", Manufacturer Part Number 1=BKP2125HS600-T, Max Current Rating=3A, Max Operating Temperature=85°C, Min Operating Temperature=-55°C, Package Quantity=1, Supplier Part Number 1=587-1932-2-ND, Test Frequency=100MHz, Tolerance=25%, Case/Package=0805, ComponentLink1Description=https://datasheet.ciiva.com/6213/bkp2125hs600-t-ss-6213090.pdf?src-supplier=Digi-Key, ComponentLink1URL=https://datasheet.ciiva.com/6213/bkp2125hs600-t-ss-6213090.pdf?src-supplier=Digi-Key, ComponentLink2Description=https://datasheet.ciiva.com/30063/884bkp2125hs600-t-30063956.pdf?src-supplier=Onlinecomponents.com, ComponentLink2URL=https://datasheet.ciiva.com/30063/884bkp2125hs600-t-30063956.pdf?src-supplier=Onlinecomponents.com, ComponentLink3Description=https://datasheet.ciiva.com/6213/mlci08-e-6213094.pdf?src-supplier=Digi-Key, ComponentLink3URL=https://datasheet.ciiva.com/6213/mlci08-e-6213094.pdf?src-supplier=Digi-Key, ComponentLink4Description=https://datasheet.ciiva.com/6213/mlci08-e-6213097.pdf?src-supplier=Digi-Key, ComponentLink4URL=https://datasheet.ciiva.com/6213/mlci08-e-6213097.pdf?src-supplier=Digi-Key, Core Material=Ferrite, Depth=1.45mm, Halogen Free="Halogen Free", Height=1.05mm, Impedance=60R, Lead Free="Lead Free", Length=2.3mm, Max DC Current=3A, Mount="Surface Mount", Number of Lines=1, Number of Pins=2, Packaging="Tape and Reel", Pricing 1="4000=0.01936, 8000=0.01755, 12000=0.01694, 28000=0.01573, 100000=0.01555 (USD)", REACH SVHC=Unknown, Resistance=25mR, RoHS=Yes, Shielding=Unshielded, Stock 1=1324000, Supplier 1=Digi-Key, Termination=SMD/SMT, Width=0.049inch
J1: library part RJ12, "CONN MOD JACK 6P6C R/A SHIELDED", Manufacturer 1="Hirose Electric company", Supplier Part Number 1=H124439-ND, Manufacturer Part Number 1=TM11R-5C-66(50), Supplier 1=Digi-Key
J2: "Connector", Manufacturer_Name="JST (JAPAN SOLDERLESS TERMINALS)", Manufacturer_Part_Number=SM05B-PASS-TBT(LF)(SN), Datasheet Link=http://www.jst-mfg.com/product/pdf/eng/ePA-F.pdf, Height=5.7mm
J3: "CONN HEADER SMD R/A 2POS 2MM", Color=Natural, Manufacturer 1=JST, Supplier Part Number 1=455-2650-2-ND, ComponentLink1Description=https://datasheet.ciiva.com/740/epa-f-740784.pdf?src-supplier=Digi-Key, ComponentLink1URL=https://datasheet.ciiva.com/740/epa-f-740784.pdf?src-supplier=Digi-Key, ComponentLink2Description=https://datasheet.ciiva.com/16487/epa-f-16487127.pdf?src-supplier=Future+Electronics, ComponentLink2URL=https://datasheet.ciiva.com/16487/epa-f-16487127.pdf?src-supplier=Future+Electronics, ComponentLink3Description=https://datasheet.ciiva.com/726/epa-f-726798.pdf?src-supplier=Digi-Key, ComponentLink3URL=https://datasheet.ciiva.com/726/epa-f-726798.pdf?src-supplier=Digi-Key, ComponentLink4Description=https://datasheet.ciiva.com/740/epa-f-740798.pdf?src-supplier=Digi-Key, ComponentLink4URL=https://datasheet.ciiva.com/740/epa-f-740798.pdf?src-supplier=Digi-Key, Connector Type="Male Pin", Contact Plating=Tin, Fastening Type=Ramp, Lead Free="Lead Free", Manufacturer Part Number 1=SM02B-PASS-TBT(LF)(SN), Mount="Surface Mount", Number of Positions=2, Number of Rows=1, Packaging="Cut Tape", Pitch=0.079inch, Pricing 1="1000=0.30811, 2000=0.29877, 3000=0.28010, 5000=0.27076, 10000=0.25209, 25000=0.24275 (USD)", RoHS=Yes, Stock 1=191000, Supplier 1=Digi-Key, System=Connector, Termination=Solder
J5: "Connector Header Surface Mount, Right Angle 3 position 0.079\" (2.00mm)", Color=Natural, Manufacturer 1=JST, Supplier Part Number 1=455-2644-2-ND, ComponentLink1Description=https://datasheet.ciiva.com/740/epa-f-740785.pdf?src-supplier=Digi-Key, ComponentLink1URL=https://datasheet.ciiva.com/740/epa-f-740785.pdf?src-supplier=Digi-Key, ComponentLink2Description=https://datasheet.ciiva.com/740/epa-f-740771.pdf?src-supplier=Digi-Key, ComponentLink2URL=https://datasheet.ciiva.com/740/epa-f-740771.pdf?src-supplier=Digi-Key, ComponentLink3Description=https://datasheet.ciiva.com/740/epa-f-740799.pdf?src-supplier=Digi-Key, ComponentLink3URL=https://datasheet.ciiva.com/740/epa-f-740799.pdf?src-supplier=Digi-Key, ComponentLink4Description=https://datasheet.ciiva.com/16487/epa-f-16487215.pdf?src-supplier=Future+Electronics, ComponentLink4URL=https://datasheet.ciiva.com/16487/epa-f-16487215.pdf?src-supplier=Future+Electronics, Connector Type="Male Pin", Contact Material=Copper, Contact Plating=Tin, Fastening Type=Ramp, Gender=Male, Lead Free="Lead Free", Manufacturer Part Number 1=SM03B-PASS-TBT(LF)(SN), Mount="Surface Mount", Number of Positions=3, Number of Rows=1, Packaging="Cut Tape", Pitch=0.079inch, Pricing 1="1000=0.40754, 2000=0.39519, 3000=0.37049, 5000=0.35814, 10000=0.33344, 25000=0.32109 (USD)", RoHS=Yes, Stock 1=48000, Supplier 1=Digi-Key, System=Connector, Termination=Solder
L1: library part Inductor, "Inductor", Manufacturer 1=Bourns, Manufacturer Part Number 1=SRN1060-470M, Supplier Part Number 1=SRN1060-470MCT-ND, Supplier 1=Digi-Key
MH1 MH2: library part Component_1
R1: library part Res, "332 kOhms ±1% 0.1W, 1/10W Chip Resistor 0402 (1005 Metric) Automotive AEC-Q200 Thick Film", Case Code (Imperial)=0402, Case Code (Metric)=1005, Manufacturer 1=Panasonic, Manufacturer Part Number 1=ERJ-2RKF3323X, Max Operating Temperature=155°C, Max Power Dissipation=100mW, Min Operating Temperature=-55°C, Package Quantity=1, Resistance=332kR, Supplier Part Number 1=P332KLTR-ND, Temperature Coefficient=100ppm/°C, Tolerance=1%, Voltage Rating=50V, Case/Package=0402, ComponentLink1Description=https://datasheet.ciiva.com/9182/aoa0000ce2-9182903.pdf?src-supplier=Avnet, ComponentLink1URL=https://datasheet.ciiva.com/9182/aoa0000ce2-9182903.pdf?src-supplier=Avnet, ComponentLink2Description=https://datasheet.ciiva.com/43467/1678782-43467528.pdf?src-supplier=Farnell, ComponentLink2URL=https://datasheet.ciiva.com/43467/1678782-43467528.pdf?src-supplier=Farnell, ComponentLink3Description=https://datasheet.ciiva.com/16784/70260748-16784778.pdf?src-supplier=Allied+Electronics, ComponentLink3URL=https://datasheet.ciiva.com/16784/70260748-16784778.pdf?src-supplier=Allied+Electronics, ComponentLink4Description=https://datasheet.ciiva.com/22672/1678782-22672842.pdf?src-supplier=Element14, ComponentLink4URL=https://datasheet.ciiva.com/22672/1678782-22672842.pdf?src-supplier=Element14, ComponentLink5Description=https://datasheet.ciiva.com/28548/1694929-28548443.pdf?src-supplier=Element14, ComponentLink5URL=https://datasheet.ciiva.com/28548/1694929-28548443.pdf?src-supplier=Element14, ComponentLink6Description=https://datasheet.ciiva.com/9182/aoa0000ce2-9182906.pdf?src-supplier=Avnet, ComponentLink6URL=https://datasheet.ciiva.com/9182/aoa0000ce2-9182906.pdf?src-supplier=Avnet, ComponentLink7Description=https://datasheet.ciiva.com/24068/aoa0000ce2-24068894.pdf?src-supplier=Mouser, ComponentLink7URL=https://datasheet.ciiva.com/24068/aoa0000ce2-24068894.pdf?src-supplier=Mouser, Composition="Thick Film", Contact Plating=Tin, Depth=0.5mm, Features="Automotive AEC-Q200", Height=0.016inch, Lead Free="Lead Free", Length=1mm, Military Standard=Not, Mount="Surface Mount", Number of Terminations=2, Packaging="Tape and Reel", Power Rating=100mW, Pricing 1="10000=0.00466, 30000=0.00410, 50000=0.00376, 100000=0.00368 (USD)", REACH SVHC=Yes, RoHS=Yes, Stock 1=250000, Supplier 1=Digi-Key, Termination=SMD/SMT, Voltage Rating (DC)=50V, Width=0.02inch
R2: library part Res, "52.3 kOhms ±1% 0.1W, 1/10W Chip Resistor 0402 (1005 Metric) Automotive AEC-Q200 Thick Film", Case Code (Imperial)=0402, Case Code (Metric)=1005, Manufacturer 1=Panasonic, Manufacturer Part Number 1=ERJ-2RKF5232X, Max Operating Temperature=155°C, Max Power Dissipation=100mW, Min Operating Temperature=-55°C, Package Quantity=1, Resistance=52.3kR, Supplier Part Number 1=P52.3KLTR-ND, Temperature Coefficient=100ppm/°C, Tolerance=1%, Voltage Rating=50V, Case/Package=0402, ComponentLink1Description=https://datasheet.ciiva.com/3883/3984280s8821682n1386-3883650.pdf?src-supplier=Arrow, ComponentLink1URL=https://datasheet.ciiva.com/3883/3984280s8821682n1386-3883650.pdf?src-supplier=Arrow, ComponentLink2Description=https://datasheet.ciiva.com/6201/426256-6201381.pdf?src-supplier=Farnell, ComponentLink2URL=https://datasheet.ciiva.com/6201/426256-6201381.pdf?src-supplier=Farnell, ComponentLink3Description=https://datasheet.ciiva.com/9188/aoa0000ce2-9188938.pdf?src-supplier=Avnet, ComponentLink3URL=https://datasheet.ciiva.com/9188/aoa0000ce2-9188938.pdf?src-supplier=Avnet, ComponentLink4Description=https://datasheet.ciiva.com/46389/426256-46389115.pdf?src-supplier=Element14, ComponentLink4URL=https://datasheet.ciiva.com/46389/426256-46389115.pdf?src-supplier=Element14, ComponentLink5Description=https://datasheet.ciiva.com/43460/426256-43460332.pdf?src-supplier=Farnell, ComponentLink5URL=https://datasheet.ciiva.com/43460/426256-43460332.pdf?src-supplier=Farnell, ComponentLink6Description=https://datasheet.ciiva.com/16781/70260748-16781070.pdf?src-supplier=Allied+Electronics, ComponentLink6URL=https://datasheet.ciiva.com/16781/70260748-16781070.pdf?src-supplier=Allied+Electronics, Composition="Thick Film", Contact Plating=Tin, Depth=0.5mm, Features="Automotive AEC-Q200", Height=0.016inch, Lead Free="Lead Free", Length=1mm, Military Standard=Not, Mount="Surface Mount", Number of Terminations=2, Packaging="Tape and Reel", Power Rating=100mW, Pricing 1="10000=0.00466, 30000=0.00410, 50000=0.00376, 100000=0.00368 (USD)", REACH SVHC="No SVHC", RoHS=Yes, Stock 1=210000, Supplier 1=Digi-Key, Termination=SMD/SMT, Voltage Rating (DC)=50V, Width=0.5mm
R3: library part Res, "Resistor", Manufacturer 1=Panasonic, Manufacturer Part Number 1=ERJ-P06F1001V, Supplier Part Number 1=P16058CT-ND, ComponentLink1Description="New link", Supplier 1=Digi-Key
R4: library part Res, "56.2 kOhms ±1% 0.1W, 1/10W Chip Resistor 0402 (1005 Metric) Automotive AEC-Q200 Thick Film", Case Code (Imperial)=0402, Case Code (Metric)=1005, Manufacturer 1=Panasonic, Manufacturer Part Number 1=ERJ-2RKF5622X, Max Operating Temperature=155°C, Max Power Dissipation=100mW, Min Operating Temperature=-55°C, Package Quantity=1, Resistance=56.2kR, Supplier Part Number 1=P56.2KLTR-ND, Temperature Coefficient=100ppm/°C, Tolerance=1%, Voltage Rating=50V, Case/Package=0402, ComponentLink1Description=https://datasheet.ciiva.com/30228/aoa0000ce2-30228952.pdf?src-supplier=Onlinecomponents.com, ComponentLink1URL=https://datasheet.ciiva.com/30228/aoa0000ce2-30228952.pdf?src-supplier=Onlinecomponents.com, ComponentLink2Description=https://datasheet.ciiva.com/28695/1678782-28695787.pdf?src-supplier=Element14, ComponentLink2URL=https://datasheet.ciiva.com/28695/1678782-28695787.pdf?src-supplier=Element14, ComponentLink3Description=https://datasheet.ciiva.com/9188/aoa0000ce2-9188636.pdf?src-supplier=Avnet, ComponentLink3URL=https://datasheet.ciiva.com/9188/aoa0000ce2-9188636.pdf?src-supplier=Avnet, ComponentLink4Description=https://datasheet.ciiva.com/43460/426256-43460333.pdf?src-supplier=Farnell, ComponentLink4URL=https://datasheet.ciiva.com/43460/426256-43460333.pdf?src-supplier=Farnell, ComponentLink5Description=https://datasheet.ciiva.com/46377/426256-46377549.pdf?src-supplier=Element14, ComponentLink5URL=https://datasheet.ciiva.com/46377/426256-46377549.pdf?src-supplier=Element14, ComponentLink6Description=https://datasheet.ciiva.com/24124/aoa0000ce2-24124319.pdf?src-supplier=Mouser, ComponentLink6URL=https://datasheet.ciiva.com/24124/aoa0000ce2-24124319.pdf?src-supplier=Mouser, Composition="Thick Film", Contact Plating=Tin, Depth=0.5mm, Features="Automotive AEC-Q200", Height=0.016inch, Lead Free="Lead Free", Length=1mm, Military Standard=Not, Mount="Surface Mount", Number of Terminations=2, Packaging="Tape and Reel", Power Rating=100mW, Pricing 1="10000=0.00466, 30000=0.00410, 50000=0.00376, 100000=0.00368 (USD)", REACH SVHC="No SVHC", RoHS=Yes, Stock 1=240000, Supplier 1=Digi-Key, Termination=SMD/SMT, Voltage Rating (DC)=50V, Weight=2.8E-05oz, Width=0.02inch
R5: library part Res, "10 kOhms ±1% 0.063W, 1/16W Chip Resistor 0402 (1005 Metric)  Thick Film", Case Code (Imperial)=0402, Case Code (Metric)=1005, Manufacturer 1=Bourns, Manufacturer Part Number 1=CR0402-FX-1002GLF, Max Operating Temperature=125°C, Max Power Dissipation=63mW, Min Operating Temperature=-55°C, Package Quantity=10000, Power Rating=62.5mW, Resistance=10kR, Supplier Part Number 1=CR0402-FX-1002GLFTR-ND, Temperature Coefficient=100ppm/°C, Tolerance=1%, Voltage Rating=50V, Case/Package=0402, ComponentLink1Description=https://datasheet.ciiva.com/30490/0900766b812730ae-30490501.pdf?src-supplier=RSComponents, ComponentLink1URL=https://datasheet.ciiva.com/30490/0900766b812730ae-30490501.pdf?src-supplier=RSComponents, ComponentLink2Description=https://datasheet.ciiva.com/6562/cr0402-6562871.pdf?src-supplier=Digi-Key, ComponentLink2URL=https://datasheet.ciiva.com/6562/cr0402-6562871.pdf?src-supplier=Digi-Key, ComponentLink3Description=https://datasheet.ciiva.com/6562/cr0402-6562873.pdf?src-supplier=Digi-Key, ComponentLink3URL=https://datasheet.ciiva.com/6562/cr0402-6562873.pdf?src-supplier=Digi-Key, ComponentLink4Description=https://datasheet.ciiva.com/7606/1896412-7606203.pdf?src-supplier=Newark, ComponentLink4URL=https://datasheet.ciiva.com/7606/1896412-7606203.pdf?src-supplier=Newark, ComponentLink5Description=https://datasheet.ciiva.com/3255/cr0402-3255916.pdf?src-supplier=Avnet, ComponentLink5URL=https://datasheet.ciiva.com/3255/cr0402-3255916.pdf?src-supplier=Avnet, ComponentLink6Description=https://datasheet.ciiva.com/30133/cr0402-30133006.pdf?src-supplier=Onlinecomponents.com, ComponentLink6URL=https://datasheet.ciiva.com/30133/cr0402-30133006.pdf?src-supplier=Onlinecomponents.com, ComponentLink7Description=https://datasheet.ciiva.com/6562/cr0402-6562911.pdf?src-supplier=Digi-Key, ComponentLink7URL=https://datasheet.ciiva.com/6562/cr0402-6562911.pdf?src-supplier=Digi-Key, ComponentLink8Description=https://datasheet.ciiva.com/22713/659744-22713205.pdf?src-supplier=Element14, ComponentLink8URL=https://datasheet.ciiva.com/22713/659744-22713205.pdf?src-supplier=Element14, ComponentLink9Description=https://datasheet.ciiva.com/22644/659744-22644166.pdf?src-supplier=Element14, ComponentLink9URL=https://datasheet.ciiva.com/22644/659744-22644166.pdf?src-supplier=Element14, ComponentLink10Description=https://datasheet.ciiva.com/16938/cr0402-16938186.pdf?src-supplier=Avnet+Europe, ComponentLink10URL=https://datasheet.ciiva.com/16938/cr0402-16938186.pdf?src-supplier=Avnet+Europe, Composition="Thick Film", Contact Plating=Tin, Depth=0.5mm, Height=0.35mm, Length=1mm, Military Standard=Not, Mount="Surface Mount", Number of Terminations=2, Packaging="Tape and Reel", Pricing 1="10000=0.00466, 30000=0.00410, 50000=0.00376, 100000=0.00368 (USD)", Radiation Hardening=No, REACH SVHC="No SVHC", RoHS=Yes, Stock 1=320000, Supplier 1=Digi-Key, Termination=SMD/SMT, Thickness=356um, Voltage Rating (DC)=50V, Width=0.5mm
R6: library part Res, "165 kOhms ±1% 0.1W, 1/10W Chip Resistor 0402 (1005 Metric) Automotive AEC-Q200 Thick Film", Case Code (Imperial)=0402, Case Code (Metric)=1005, Manufacturer 1=Panasonic, Manufacturer Part Number 1=ERJ-2RKF1653X, Max Operating Temperature=155°C, Max Power Dissipation=100mW, Min Operating Temperature=-55°C, Package Quantity=10000, Resistance=165kR, Supplier Part Number 1=P165KLTR-ND, Temperature Coefficient=100ppm/°C, Tolerance=1%, Voltage Rating=50V, Case/Package=0402, ComponentLink1Description=https://datasheet.ciiva.com/43460/426256-43460341.pdf?src-supplier=Farnell, ComponentLink1URL=https://datasheet.ciiva.com/43460/426256-43460341.pdf?src-supplier=Farnell, ComponentLink2Description=https://datasheet.ciiva.com/30096/aoa0000ce2-30096043.pdf?src-supplier=Onlinecomponents.com, ComponentLink2URL=https://datasheet.ciiva.com/30096/aoa0000ce2-30096043.pdf?src-supplier=Onlinecomponents.com, ComponentLink3Description=https://datasheet.ciiva.com/9119/aoa0000ce2-9119277.pdf?src-supplier=Avnet, ComponentLink3URL=https://datasheet.ciiva.com/9119/aoa0000ce2-9119277.pdf?src-supplier=Avnet, ComponentLink4Description=https://datasheet.ciiva.com/24160/aoa0000ce2-24160157.pdf?src-supplier=Mouser, ComponentLink4URL=https://datasheet.ciiva.com/24160/aoa0000ce2-24160157.pdf?src-supplier=Mouser, ComponentLink5Description=https://datasheet.ciiva.com/46388/426256-46388701.pdf?src-supplier=Element14, ComponentLink5URL=https://datasheet.ciiva.com/46388/426256-46388701.pdf?src-supplier=Element14, ComponentLink6Description=https://datasheet.ciiva.com/16771/70260748-16771999.pdf?src-supplier=Allied+Electronics, ComponentLink6URL=https://datasheet.ciiva.com/16771/70260748-16771999.pdf?src-supplier=Allied+Electronics, Composition="Thick Film", Contact Plating=Tin, Depth=0.5mm, Height=0.016inch, Lead Free="Lead Free", Length=1mm, Military Standard=Not, Mount="Surface Mount", Number of Terminations=2, Packaging="Tape and Reel", Power Rating=100mW, Pricing 1="10000=0.00466, 30000=0.00410, 50000=0.00376, 100000=0.00368 (USD)", Radiation Hardening=No, REACH SVHC="No SVHC", RoHS=Yes, Stock 1=170000, Supplier 1=Digi-Key, Termination=SMD/SMT, Voltage Rating (DC)=50V, Weight=2.8E-05oz, Width=0.02inch
R7: library part Res, "76.8 kOhms ±1% 0.1W, 1/10W Chip Resistor 0402 (1005 Metric) Automotive AEC-Q200 Thick Film", Case Code (Imperial)=0402, Case Code (Metric)=1005, Manufacturer 1=Panasonic, Manufacturer Part Number 1=ERJ-2RKF7682X, Max Operating Temperature=155°C, Max Power Dissipation=100mW, Min Operating Temperature=-55°C, Package Quantity=1, Resistance=76.8kR, Supplier Part Number 1=P76.8KLTR-ND, Temperature Coefficient=100ppm/°C, Tolerance=1%, Voltage Rating=50V, Case/Package=0402, ComponentLink1Description=https://datasheet.ciiva.com/9187/aoa0000ce2-9187639.pdf?src-supplier=Avnet, ComponentLink1URL=https://datasheet.ciiva.com/9187/aoa0000ce2-9187639.pdf?src-supplier=Avnet, ComponentLink2Description=https://datasheet.ciiva.com/30157/aoa0000ce2-30157735.pdf?src-supplier=Onlinecomponents.com, ComponentLink2URL=https://datasheet.ciiva.com/30157/aoa0000ce2-30157735.pdf?src-supplier=Onlinecomponents.com, ComponentLink3Description=https://datasheet.ciiva.com/46373/1678782-46373864.pdf?src-supplier=Element14, ComponentLink3URL=https://datasheet.ciiva.com/46373/1678782-46373864.pdf?src-supplier=Element14, ComponentLink4Description=https://datasheet.ciiva.com/16784/70260748-16784334.pdf?src-supplier=Allied+Electronics, ComponentLink4URL=https://datasheet.ciiva.com/16784/70260748-16784334.pdf?src-supplier=Allied+Electronics, ComponentLink5Description=https://datasheet.ciiva.com/16760/70260748-16760665.pdf?src-supplier=Allied+Electronics, ComponentLink5URL=https://datasheet.ciiva.com/16760/70260748-16760665.pdf?src-supplier=Allied+Electronics, ComponentLink6Description=https://datasheet.ciiva.com/22729/1678782-22729993.pdf?src-supplier=Farnell, ComponentLink6URL=https://datasheet.ciiva.com/22729/1678782-22729993.pdf?src-supplier=Farnell, ComponentLink7Description=https://datasheet.ciiva.com/46373/1678782-46373865.pdf?src-supplier=Element14, ComponentLink7URL=https://datasheet.ciiva.com/46373/1678782-46373865.pdf?src-supplier=Element14, ComponentLink8Description=https://datasheet.ciiva.com/9187/aoa0000ce2-9187642.pdf?src-supplier=Avnet, ComponentLink8URL=https://datasheet.ciiva.com/9187/aoa0000ce2-9187642.pdf?src-supplier=Avnet, ComponentLink9Description=https://datasheet.ciiva.com/22682/1678782-22682462.pdf?src-supplier=Element14, ComponentLink9URL=https://datasheet.ciiva.com/22682/1678782-22682462.pdf?src-supplier=Element14, ComponentLink10Description=https://datasheet.ciiva.com/43467/1678782-43467471.pdf?src-supplier=Farnell, ComponentLink10URL=https://datasheet.ciiva.com/43467/1678782-43467471.pdf?src-supplier=Farnell, Composition="Thick Film", Contact Plating=Tin, Depth=0.5mm, Features="Automotive AEC-Q200", Height=0.35mm, Lead Free="Lead Free", Length=1mm, Military Standard=Not, Mount="Surface Mount", Number of Terminations=2, Packaging="Tape and Reel", Power Rating=100mW, Pricing 1="10000=0.00466, 30000=0.00410, 50000=0.00376, 100000=0.00368 (USD)", REACH SVHC=Yes, RoHS=Yes, Stock 1=360000, Supplier 1=Digi-Key, Termination=SMD/SMT, Voltage Rating (DC)=50V, Width=0.02inch
R8 R9: library part Res, "Resistor", Manufacturer 1="Stackpole Electronics", Manufacturer Part Number 1=RMCF1206FT2K00, Supplier Part Number 1=RMCF1206FT2K00CT-ND, Supplier 1=Digi-Key
U1: "Buck Inverting Buck-Boost Step Down Regulator with 3.5 to 60 V Input and 0.8 to 58 V Output, -40 to 150 degC, 10-Pin SON (DRC), Green (RoHS & no Sb/Br)", Manufacturer 1="Texas Instruments", Max Input Voltage=60V, Max Operating Temperature=125°C, Max Output Current=2.5A, Max Output Voltage=58V, Min Input Voltage=3.5V, Min Operating Temperature=-40°C, Min Output Voltage=800mV, Package Quantity=3000, Quiescent Current=138uA, Supplier Part Number 1=296-39416-2-ND, Switching Frequency=720kHz, ComponentLink1Description=https://datasheet.ciiva.com/2035/tps54260-2035403.pdf?src-supplier=Digi-Key, ComponentLink1URL=https://datasheet.ciiva.com/2035/tps54260-2035403.pdf?src-supplier=Digi-Key, Contact Plating=Gold, Lead Free="Lead Free", Manufacturer Part Number 1=TPS54260DRCR, Number of Outputs=1, Number of Pins=10, Output Configuration=Positive, Output Current=2.5A, Output Type=Adjustable, Output Voltage=58V, Packaging="Tape and Reel", Pricing 1="3000=1.74592 (USD)", RoHS=Yes, Stock 1=15000, Supplier 1=Digi-Key, Synchronous Rectifier=No, Topology=Buck-Boost

## Free pads (board coordinates)
  round 420 hole 399.37 unplated: 2(2476.35,449.63) ""(1023.53,449.63)

## Via types
v1: diameter 15, hole 8, Top Layer to Bottom Layer, 177 vias
v2: diameter 20, hole 20, Top Layer to Bottom Layer, 5 vias
v3: diameter 25, hole 12, Top Layer to Bottom Layer, 4 vias
v4: diameter 45, hole 12, Top Layer to Bottom Layer, 1 vias

## Nets (pads, with @x,y where several pads share a name; then routed paths per layer and width w, separated by ;. In a path a pad name is that pad's centre, name@x,y a point inside that pad or via, vN(x,y) a via of type N, cw(c..) or ccw(c..) an arc to the next point about the centre after c; other vN are vias at no path point)
5V: C2.2 C4.2 C10.1 C11.2 FB2.1 L1.2 R2.1 | length 398.5
  Top Layer w20: R2.1 1110.27,779.2 1130.94,779.2 1159.6,779.2 v1(1159.94,779.54)
  Top Layer w30: FB2.1 660.88,1289.54 690.88,1319.54 694.94,1319.54 795.02,1319.54 L1.2 L1.2@884.94,1389.61
  other v1: 645.71,1189.36 715.71,1189.36 785.71,1189.36 680.71,1259.36 750.71,1259.36 645.71,1329.36 715.71,1329.36 785.71,1329.36 680.71,1399.36 750.71,1399.36 715.71,1469.36 785.71,1469.36 680.71,1539.36 750.71,1539.36 715.71,1609.36 785.71,1609.36
24V: C7.1 C8.2 F1.2 J1.1 J1.2 | length 1193.5
  Top Layer w18: C7.1 C8.2 ; C8.2@1809.78,1649.69 1809.94,1649.54 1861,1598.47 1861,1423 J1.1@1858.5,1420.5
  Top Layer w60: J1.1@1858.5,1420.5 1858.5,1390.9 1821,1353.4 1821,1323 2058.4,1323 2169.94,1434.54 2169.94,1549.54 2215.61,1595.21 F1.2
24V_F: C3.2 FB1.1 FB4.1 J5.2 | length 3197.8
  Top Layer w30: J5.2@364.98,349.54 569.94,349.54 639.94,279.54 ; 639.94,808.69 639.94,279.54 ; C3.2 639.94,809.54 639.94,885.72 FB4.1@669.23,915.01 ; FB1.1@2425.41,1068.61 1528.84,172.04 747.44,172.04 639.94,279.54
  Top Layer w50: FB4.1@669.23,915.01 672.94,915.01 673.54,915.6 FB4.1 ; FB1.1@2425.41,1068.61 2425.41,1072.54 2426,1073.13 FB1.1
A_GND: FB3.1 J1.7 J1.8 J1.9 J1.10 J2.5 J2.MP1 J2.MP2 J3.3 J5.3 J5.MF MH1.1 MH2.1 | length 209.1
  Top Layer w50: FB3.1 2850.34,1490.47 2984.4,1624.54 MH1.1@2999.94,1624.54